# Altium PCB Chargeur Plomb.PcbDoc
Units mil, origin at the board's own origin, x right, y up, seen from the top; angles counter-clockwise.
Board outline 6000 x 4000 mil, 2 copper layers (Top Layer, Bottom Layer); 69 components, 0 nets, 208 pads, 0 vias.
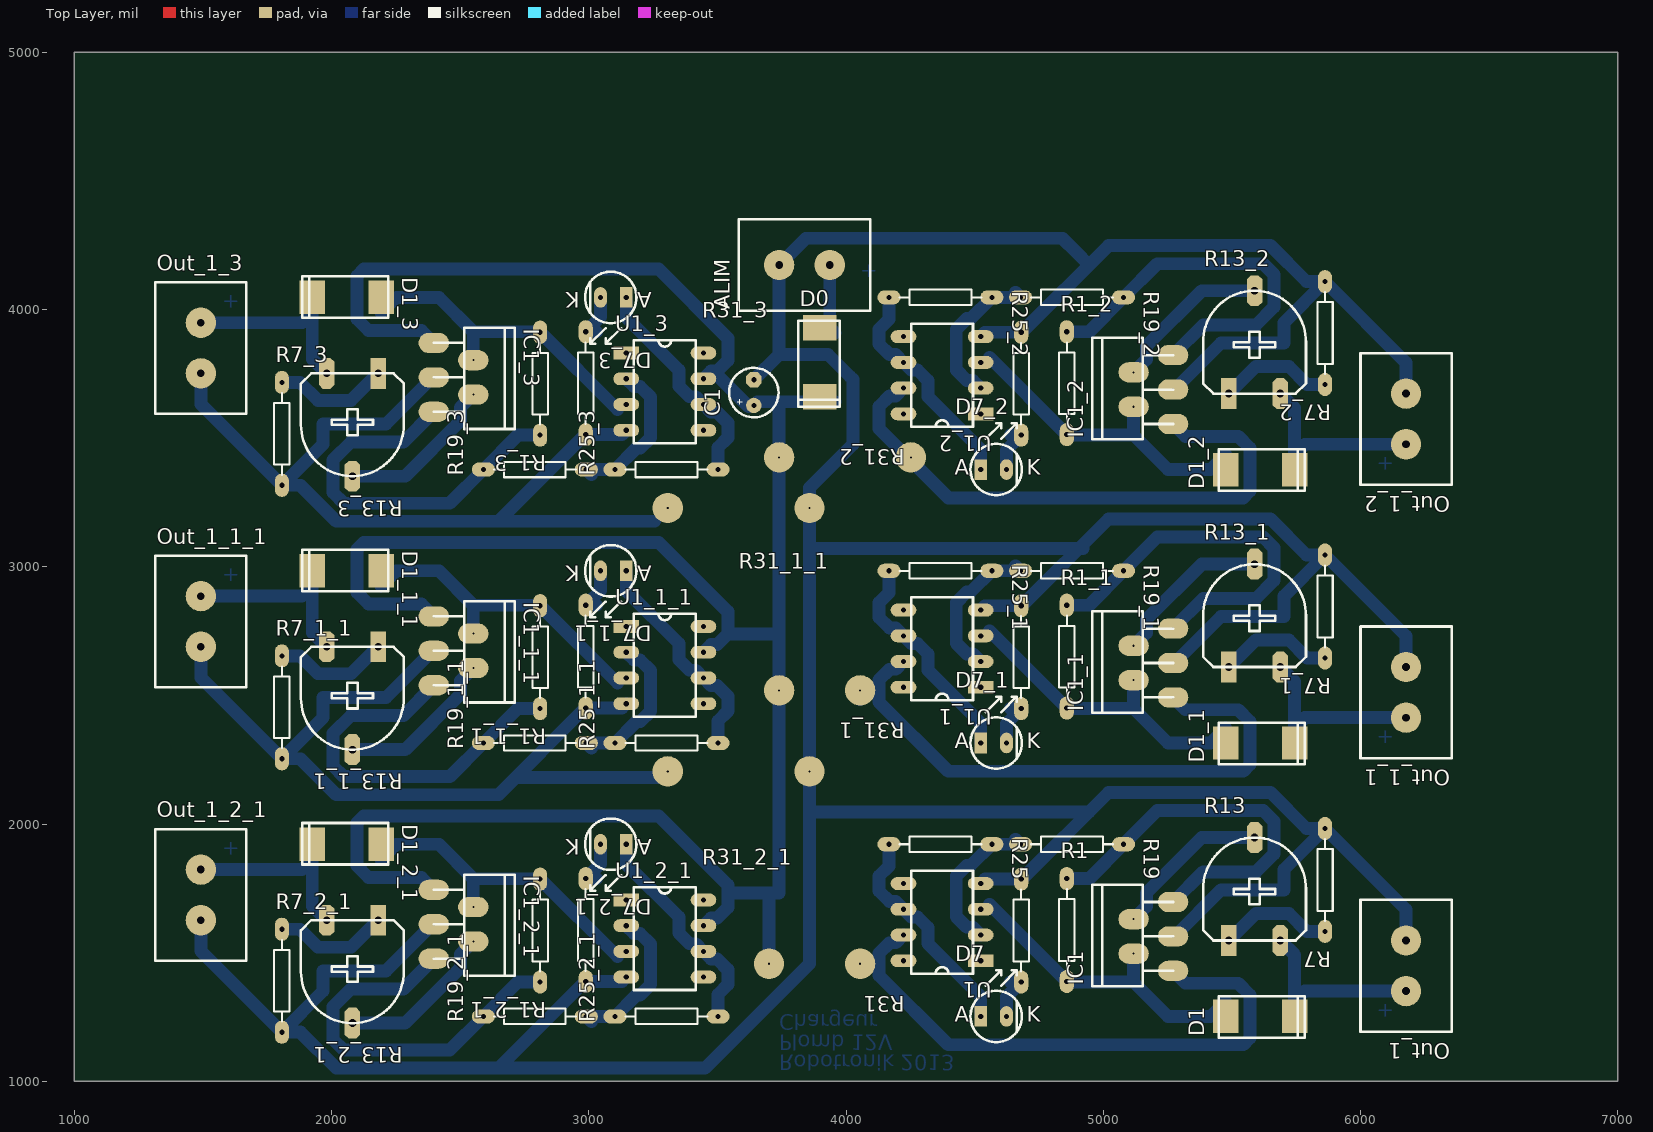
[diagram p0: Top Layer view]
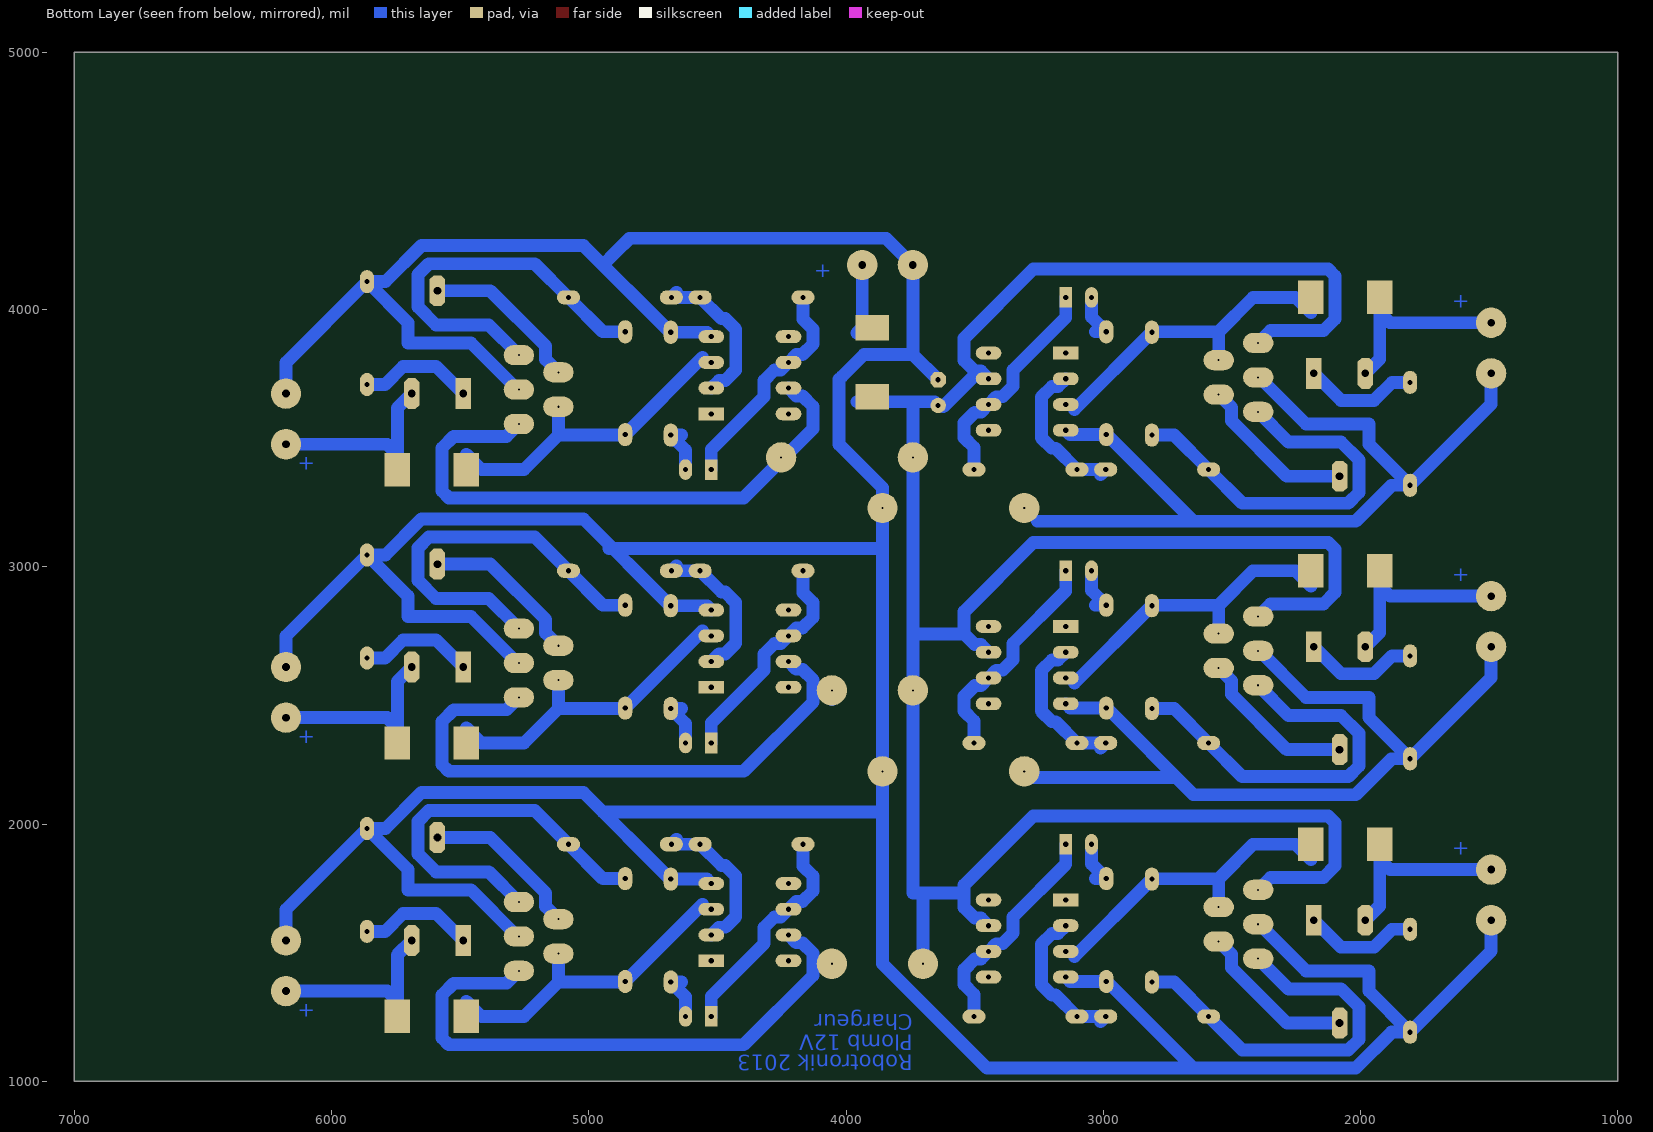
[diagram p1: Bottom Layer view, seen from below]

## Layer stack, top to bottom
Top Solder: solder mask 0.4, Solder Resist, Dk 3.5
Top Layer: signal copper 1.4
Dielectric1: dielectric 12.6, FR-4, Dk 4.8
Bottom Layer: signal copper 1.4
Bottom Solder: solder mask 0.4, Solder Resist, Dk 3.5

## Board outline
1000,1000 7000,1000 7000,5000 1000,5000

## Design rules (kind name [scope] priority, off if disabled: settings)
Clearance [All] p1: gap=20
PolygonConnect [All] p1: connectstyle=Relief reliefconductorwidth=10 reliefentries=4 polygonreliefangle="90 Angle" airgapwidth=10
RoutingVias [All] p1: holewidth=28 width=50 viastyle="Through Hole" minholewidth=28 minwidth=50 maxholewidth=28 maxwidth=50
SilkToSolderMaskClearance SilkscreenOverComponentPads [IsPad] p1: minsilkscreentomaskgap=10 clearancetoexposedcopper=TRUE
SolderMaskExpansion [All] p1: expansion=4
UnpouredPolygon [All] p1: allowunpoured=FALSE
Width [All] p1: maxlimit=50 minlimit=50 preferedwidth=50
28 further rules are at their usual default settings.

## Components (designator, comment, footprint, x,y, rotation, side; value= is the part's Value field where it differs from the comment)
ALIM "Bornier" Bornier 3937.01,4133.86 r180 top
C1 "470uF" Capa_pol1 3641.73,3622.05 r90 top
D0 "Schottky B340" SMC 3897.64,3661.42 r90 top
D1 "Schottky B340" SMC 5744.09,1251.97 r180 top
D1_1 "Schottky B340" SMC 5744.09,2314.96 r180 top (schematic designator D1)
D1_1_1 "Schottky B340" SMC 1925.2,2984.25 r0 top (schematic designator D1)
D1_2 "Schottky B340" SMC 5744.09,3377.95 r180 top (schematic designator D1)
D1_2_1 "Schottky B340" SMC 1925.2,1921.26 r0 top (schematic designator D1)
D1_3 "Schottky B340" SMC 1925.2,4047.24 r0 top (schematic designator D1)
D7 "Led" LED 4523.62,1251.97 r0 top
D7_1 "Led" LED 4523.62,2314.96 r0 top (schematic designator D7)
D7_1_1 "Led" LED 3145.67,2984.25 r180 top (schematic designator D7)
D7_2 "Led" LED 4523.62,3377.95 r0 top (schematic designator D7)
D7_2_1 "Led" LED 3145.67,1921.26 r180 top (schematic designator D7)
D7_3 "Led" LED 3145.67,4047.24 r180 top (schematic designator D7)
IC1 "L200" Pentawatt 5271.65,1429.13 r90 top
IC1_1 "L200" Pentawatt 5271.65,2492.13 r90 top (schematic designator IC1)
IC1_1_1 "L200" Pentawatt 2397.64,2807.09 r270 top (schematic designator IC1)
IC1_2 "L200" Pentawatt 5271.65,3555.12 r90 top (schematic designator IC1)
IC1_2_1 "L200" Pentawatt 2397.64,1744.09 r270 top (schematic designator IC1)
IC1_3 "L200" Pentawatt 2397.64,3870.08 r270 top (schematic designator IC1)
Out_1 "Bornier" Bornier 6216.54,1547.24 r270 top
Out_1_1 "Bornier" Bornier 6216.54,2610.24 r270 top (schematic designator Out_1)
Out_1_1_1 "Bornier" Bornier 1452.76,2688.98 r90 top (schematic designator Out_1)
Out_1_2 "Bornier" Bornier 6216.54,3673.23 r270 top (schematic designator Out_1)
Out_1_2_1 "Bornier" Bornier 1452.76,1625.98 r90 top (schematic designator Out_1)
Out_1_3 "Bornier" Bornier 1452.76,3751.97 r90 top (schematic designator Out_1)
R1 "2.2 ohm" "traversant 1/4W" 4858.27,1527.56 r90 top
R1_1 "2.2 ohm" "traversant 1/4W" 4858.27,2590.55 r90 top (schematic designator R1)
R1_1_1 "2.2 ohm" "traversant 1/4W" 2811.02,2708.66 r270 top (schematic designator R1)
R1_2 "2.2 ohm" "traversant 1/4W" 4858.27,3653.54 r90 top (schematic designator R1)
R1_2_1 "2.2 ohm" "traversant 1/4W" 2811.02,1645.67 r270 top (schematic designator R1)
R1_3 "2.2 ohm" "traversant 1/4W" 2811.02,3771.65 r270 top (schematic designator R1)
R7 "1K" "traversant 1/4W" 5862.2,1842.52 r270 top
R7_1 "1K" "traversant 1/4W" 5862.2,2905.51 r270 top (schematic designator R7)
R7_1_1 "1K" "traversant 1/4W" 1807.09,2393.7 r90 top (schematic designator R7)
R7_2 "1K" "traversant 1/4W" 5862.2,3968.5 r270 top (schematic designator R7)
R7_2_1 "1K" "traversant 1/4W" 1807.09,1330.71 r90 top (schematic designator R7)
R7_3 "1K" "traversant 1/4W" 1807.09,3456.69 r90 top (schematic designator R7)
R13 "RPot" AJUSTABLE 5488.19,1547.24 r0 top
R13_1 "RPot" AJUSTABLE 5488.19,2610.24 r0 top (schematic designator R13)
R13_1_1 "RPot" AJUSTABLE 2181.1,2688.98 r180 top (schematic designator R13)
R13_2 "RPot" AJUSTABLE 5488.19,3673.23 r0 top (schematic designator R13)
R13_2_1 "RPot" AJUSTABLE 2181.1,1625.98 r180 top (schematic designator R13)
R13_3 "RPot" AJUSTABLE 2181.1,3751.97 r180 top (schematic designator R13)
R19 "1K" "traversant 1/4W" 4818.9,1921.26 r0 top
R19_1 "1K" "traversant 1/4W" 4818.9,2984.25 r0 top (schematic designator R19)
R19_1_1 "1K" "traversant 1/4W" 2850.39,2314.96 r180 top (schematic designator R19)
R19_2 "1K" "traversant 1/4W" 4818.9,4047.24 r0 top (schematic designator R19)
R19_2_1 "1K" "traversant 1/4W" 2850.39,1251.97 r180 top (schematic designator R19)
R19_3 "1K" "traversant 1/4W" 2850.39,3377.95 r180 top (schematic designator R19)
R25 "10K" "traversant 1/4W" 4307.09,1921.26 r0 top
R25_1 "10K" "traversant 1/4W" 4307.09,2984.25 r0 top (schematic designator R25)
R25_1_1 "10K" "traversant 1/4W" 3362.2,2314.96 r180 top (schematic designator R25)
R25_2 "10K" "traversant 1/4W" 4307.09,4047.24 r0 top (schematic designator R25)
R25_2_1 "10K" "traversant 1/4W" 3362.2,1251.97 r180 top (schematic designator R25)
R25_3 "10K" "traversant 1/4W" 3362.2,3377.95 r180 top (schematic designator R25)
R31 "1kohm" "traversant 1/4W" 4681.1,1645.67 r270 top
R31_1 "1kohm" "traversant 1/4W" 4681.1,2708.66 r270 top (schematic designator R31)
R31_1_1 "1kohm" "traversant 1/4W" 2988.19,2590.55 r90 top (schematic designator R31)
R31_2 "1kohm" "traversant 1/4W" 4681.1,3771.65 r270 top (schematic designator R31)
R31_2_1 "1kohm" "traversant 1/4W" 2988.19,1527.56 r90 top (schematic designator R31)
R31_3 "1kohm" "traversant 1/4W" 2988.19,3653.54 r90 top (schematic designator R31)
U1 "TL081CN" DIP8 4523.62,1468.5 r180 top
U1_1 "TL081CN" DIP8 4523.62,2531.5 r180 top (schematic designator U1)
U1_1_1 "TL081CN" DIP8 3145.67,2767.72 r0 top (schematic designator U1)
U1_2 "TL081CN" DIP8 4523.62,3594.49 r180 top (schematic designator U1)
U1_2_1 "TL081CN" DIP8 3145.67,1704.72 r0 top (schematic designator U1)
U1_3 "TL081CN" DIP8 3145.67,3830.71 r0 top (schematic designator U1)

## Footprints (in the part's own frame and the unit in brackets; to place one, negate y for a bottom-side part, rotate by r counter-clockwise, add the part's x,y. Pads: shape width x height; smd on the part's side, far side on the other; paste and mask are expansions set on the pad)
AJUSTABLE [mil]
  rect 60x120 hole 30: 1(0,0)
  oct 60x120 hole 30: 2(100,400) 3(200,0)
  silkscreen extent -100,0 300,400
Bornier [mm]
  round 3 hole 0.762: 1(0,-1) 2(5,-1)
  silkscreen extent -4,-5.5 9,3.5
Capa_pol1 [mil]
  round 60 hole 20: 1(5,0)
  oct 60x60 hole 20: 2(105,0)
  silkscreen extent -41,-96 151,96
DIP8 [mil]
  rect 100x50 hole 20: 1(0,0)
  oval 100x50 hole 20: 2(0,-100) 3(0,-200) 4(0,-300) 5(300,-300) 6(300,-200) 7(300,-100) 8(300,0)
  silkscreen extent 30,-350 270,50
LED [mil]
  rect 50x80 hole 20: 1(0,0)
  oval 50x80 hole 20: 2(100,0)
  silkscreen extent -40,-100 160,180
Pentawatt [mm]
  oval 2x3 hole 0.2: 1(0,0) 2(1.7,3.9) 3(3.4,0) 4(5.1,3.9) 5(6.8,0)
  silkscreen extent -1.5,0 8.5,8
SMC [mm]
  rect 2.5x3.3 all layers, no hole: 1(6.8,0) 2(0,0)
  silkscreen extent -1,-2 7.5,2.1
"traversant 1/4W" [mil]
  oval 90x55 hole 20: 1(-140,0) 2(260,0)
  silkscreen extent -99,-30 219,30

## Part data
ALIM Out_1 Out_1_1 Out_1_1_1 Out_1_2 Out_1_2_1 Out_1_3: library part Bornier2
C1: library part "Capa Pol"
D7 D7_1 D7_1_1 D7_2 D7_2_1 D7_3: "LED"
R1 R1_1 R1_1_1 R1_2 R1_2_1 R1_3 R7 R7_1 R7_1_1 R7_2 R7_2_1 R7_3 R19 R19_1 R19_1_1 R19_2 R19_2_1 R19_3 R25 R25_1 R25_1_1 R25_2 R25_2_1 R25_3 R31 R31_1 R31_1_1 R31_2 R31_2_1 R31_3: library part Resistance
R13 R13_1 R13_1_1 R13_2 R13_2_1 R13_3: "Potentiometer"
U1 U1_1 U1_1_1 U1_2 U1_2_1 U1_3: "General-Purpose J-FET Single Operational Amplifier"

## Free pads (board coordinates)
  round 118.11 hole 7.87: 2(3858.27,2204.72) 3(3307.09,2204.72) 6(4055.12,1456.69) 7(3700.79,1456.69) 8(4055.12,2519.68) 9(3740.16,2519.68) 10(3858.27,3228.35) 11(3307.09,3228.35) 12(4251.97,3425.2) 13(3740.16,3425.2)

## Nets (pads, with @x,y where several pads share a name; then routed paths per layer and width w, separated by ;. In a path a pad name is that pad's centre, name@x,y a point inside that pad or via, vN(x,y) a via of type N, cw(c..) or ccw(c..) an arc to the next point about the centre after c; other vN are vias at no path point)
pads on no net: ALIM.1 ALIM.2 C1.1 C1.2 D0.1 D0.2 D1.1 D1.2 D1_1.1 D1_1.2 D1_1_1.1 D1_1_1.2 D1_2.1 D1_2.2 D1_2_1.1 D1_2_1.2 D1_3.1 D1_3.2 D7.1 D7.2 D7_1.1 D7_1.2 D7_1_1.1 D7_1_1.2 D7_2.1 D7_2.2 D7_2_1.1 D7_2_1.2 D7_3.1 D7_3.2 IC1.1 IC1.2 IC1.3 IC1.4 IC1.5 IC1_1.1 IC1_1.2 IC1_1.3 IC1_1.4 IC1_1.5 IC1_1_1.1 IC1_1_1.2 IC1_1_1.3 IC1_1_1.4 IC1_1_1.5 IC1_2.1 IC1_2.2 IC1_2.3 IC1_2.4 IC1_2.5 IC1_2_1.1 IC1_2_1.2 IC1_2_1.3 IC1_2_1.4 IC1_2_1.5 IC1_3.1 IC1_3.2 IC1_3.3 IC1_3.4 IC1_3.5 Out_1.1 Out_1.2 Out_1_1.1 Out_1_1.2 Out_1_1_1.1 Out_1_1_1.2 Out_1_2.1 Out_1_2.2 Out_1_2_1.1 Out_1_2_1.2 Out_1_3.1 Out_1_3.2 R1.1 R1.2 R1_1.1 R1_1.2 R1_1_1.1 R1_1_1.2 R1_2.1 R1_2.2 R1_2_1.1 R1_2_1.2 R1_3.1 R1_3.2 R7.1 R7.2 R7_1.1 R7_1.2 R7_1_1.1 R7_1_1.2 R7_2.1 R7_2.2 R7_2_1.1 R7_2_1.2 R7_3.1 R7_3.2 R13.1 R13.2 R13.3 R13_1.1 R13_1.2 R13_1.3 R13_1_1.1 R13_1_1.2 R13_1_1.3 R13_2.1 R13_2.2 R13_2.3 R13_2_1.1 R13_2_1.2 R13_2_1.3 R13_3.1 R13_3.2 R13_3.3 R19.1 R19.2 R19_1.1 R19_1.2 R19_1_1.1 R19_1_1.2 R19_2.1 R19_2.2 R19_2_1.1 R19_2_1.2 R19_3.1 R19_3.2 R25.1 R25.2 R25_1.1 R25_1.2 R25_1_1.1 R25_1_1.2 R25_2.1 R25_2.2 R25_2_1.1 R25_2_1.2 R25_3.1 R25_3.2 R31.1 R31.2 R31_1.1 R31_1.2 R31_1_1.1 R31_1_1.2 R31_2.1 R31_2.2 R31_2_1.1 R31_2_1.2 R31_3.1 R31_3.2 U1.1 U1.2 U1.3 U1.4 U1.5 U1.6 U1.7 U1.8 U1_1.1 U1_1.2 U1_1.3 U1_1.4 U1_1.5 U1_1.6 U1_1.7 U1_1.8 U1_1_1.1 U1_1_1.2 U1_1_1.3 U1_1_1.4 U1_1_1.5 U1_1_1.6 U1_1_1.7 U1_1_1.8 U1_2.1 U1_2.2 U1_2.3 U1_2.4 U1_2.5 U1_2.6 U1_2.7 U1_2.8 U1_2_1.1 U1_2_1.2 U1_2_1.3 U1_2_1.4 U1_2_1.5 U1_2_1.6 U1_2_1.7 U1_2_1.8 U1_3.1 U1_3.2 U1_3.3 U1_3.4 U1_3.5 U1_3.6 U1_3.7 U1_3.8
copper on no net: | length 81338.9
  Bottom Layer w50: 1492.13,1625.98 1492.13,1505.67 1807.09,1190.71 ; 1492.13,1822.83 1885.83,1822.83 1925.2,1862.2 1925.2,1681.89 1981.1,1625.98 ; 1492.13,2688.98 1492.13,2568.66 1807.09,2253.7 ; 1492.13,2885.83 1885.83,2885.83 1925.2,2925.2 1925.2,2744.88 1981.1,2688.98 ; 1492.13,3751.97 1492.13,3631.65 1807.09,3316.69 ; 1492.13,3948.82 1885.83,3948.82 1925.2,3988.19 1925.2,3807.87 1981.1,3751.97 ; 1807.09,1590.71 1877.74,1590.71 1947.46,1520.98 2076.1,1520.98 2181.1,1625.98 ; 1807.09,2653.7 1877.74,2653.7 1947.46,2583.98 2076.1,2583.98 2181.1,2688.98 ; 1807.09,3716.69 1877.74,3716.69 1947.46,3646.97 2076.1,3646.97 2181.1,3751.97 ; 2081.1,1225.98 2286.25,1225.98 2501.69,1441.43 2501.69,1493.82 2551.18,1543.31 ; 2081.1,2288.98 2286.25,2288.98 2501.69,2504.42 2501.69,2556.81 2551.18,2606.3 ; 2081.1,3351.97 2286.25,3351.97 2501.69,3567.42 2501.69,3619.8 2551.18,3669.29 ; 2192.91,1862.2 2251.97,1921.26 2417.32,1921.26 2551.18,1787.4 ; 2192.91,2925.2 2251.97,2984.25 2417.32,2984.25 2551.18,2850.39 ; 2192.91,3988.19 2251.97,4047.24 2417.32,4047.24 2551.18,3913.39 ; 2397.64,1476.38 2280.39,1359.13 2075.61,1359.13 2006.1,1289.62 2006.1,1162.34 2047.46,1120.98 2459.41,1120.98 2590.39,1251.97 2724.09,1385.67 2811.02,1385.67 ; 2397.64,1610.24 2392.49,1610.24 2211.39,1429.13 1966.77,1429.13 1966.77,1350.39 1807.09,1190.71 ; 2397.64,1744.09 2349.53,1792.2 2144.16,1792.2 2098.7,1837.66 2098.7,2004.86 2125.06,2031.22 2684.76,2031.22 3271.93,2031.22 3540.67,1762.48 3540.67,1675.73 3499.66,1634.72 3475.67,1634.72 3445.67,1604.72 ; 2397.64,2539.37 2280.39,2422.13 2075.61,2422.13 2006.1,2352.62 2006.1,2225.34 2047.46,2183.98 2459.41,2183.98 2590.39,2314.96 2724.09,2448.66 2811.02,2448.66 ; 2397.64,2673.23 2392.49,2673.23 2211.39,2492.13 1966.77,2492.13 1966.77,2413.39 1807.09,2253.7 ; 2397.64,2807.09 2349.53,2855.2 2144.16,2855.2 2098.7,2900.65 2098.7,3067.85 2125.06,3094.21 2684.76,3094.21 3271.93,3094.21 3540.67,2825.47 3540.67,2738.72 ; 2397.64,3602.36 2280.39,3485.12 2075.61,3485.12 2006.1,3415.61 2006.1,3288.33 2047.46,3246.97 2459.41,3246.97 2590.39,3377.95 2724.09,3511.65 2811.02,3511.65 ; 2397.64,3736.22 2392.49,3736.22 2211.39,3555.12 1966.77,3555.12 1966.77,3476.38 1807.09,3316.69 ; 2397.64,3870.08 2349.53,3918.19 2144.16,3918.19 2098.7,3963.64 2098.7,4130.84 2125.06,4157.2 2684.76,4157.2 3271.93,4157.2 3540.67,3888.46 3540.67,3801.71 3499.66,3760.71 ; 2551.18,1677.17 2551.18,1787.4 ; 2551.18,2740.16 2551.18,2850.39 ; 2551.18,3803.15 2551.18,3913.39 ; 2716.54,2181.35 3291.09,2181.35 ; 2990.71,1385.04 2988.19,1387.56 ; 2990.71,2448.03 2988.19,2450.55 ; 2990.71,3511.02 2988.19,3513.54 ; 3010.08,1232.28 2990.39,1251.97 3102.2,1251.97 3184.96,1334.72 3199.66,1334.72 3240.67,1375.73 3240.67,1533.72 3199.66,1574.72 3175.67,1574.72 3145.67,1604.72 ; 3010.08,2295.28 2990.39,2314.96 3102.2,2314.96 3184.96,2397.72 3199.66,2397.72 3240.67,2438.72 3240.67,2596.71 3199.66,2637.72 3175.67,2637.72 3145.67,2667.72 ; 3010.08,3358.27 2990.39,3377.95 3102.2,3377.95 3184.96,3460.71 3199.66,3460.71 3240.67,3501.71 3240.67,3659.7 3199.66,3700.71 3175.67,3700.71 3145.67,3730.71 ; 3030.08,1787.56 2988.19,1787.56 3045.67,1845.04 3045.67,1921.26 ; 3030.08,2850.55 2988.19,2850.55 3045.67,2908.03 3045.67,2984.25 ; 3030.08,3913.54 2988.19,3913.54 3045.67,3971.02 3045.67,4047.24 ; 3111.65,1485.04 2811.02,1785.67 2809.29,1787.4 2551.18,1787.4 ; 3111.65,2548.03 2811.02,2848.66 2809.29,2850.39 2551.18,2850.39 ; 3111.65,3611.02 2811.02,3911.65 2809.29,3913.39 2551.18,3913.39 ; 3145.67,1404.72 3128.5,1387.56 2988.19,1387.56 ; 3145.67,1921.26 3145.67,1843.36 3350.67,1638.36 3350.67,1575.73 3391.67,1534.72 3415.67,1534.72 3445.67,1504.72 3475.67,1474.72 3499.66,1474.72 3540.67,1433.72 3540.67,1375.73 3502.2,1337.27 3502.2,1251.97 ; 3145.67,2467.72 3128.5,2450.55 2988.19,2450.55 ; 3145.67,2984.25 3145.67,2906.36 3350.67,2701.36 3350.67,2638.72 3391.67,2597.72 3415.67,2597.72 3445.67,2567.72 3475.67,2537.72 3499.66,2537.72 3540.67,2496.71 3540.67,2438.72 3502.2,2400.26 3502.2,2314.96 ; 3145.67,3530.71 3128.5,3513.54 2988.19,3513.54 ; 3145.67,4047.24 3145.67,3969.35 3350.67,3764.35 3350.67,3701.71 3391.67,3660.71 3415.67,3660.71 3445.67,3630.71 3475.67,3600.71 3499.66,3600.71 3540.67,3559.7 3540.67,3501.71 3502.2,3463.25 3502.2,3377.95 ; 3255.71,3176.97 2649.16,3176.97 ; 3445.67,2667.72 3475.67,2697.72 3499.66,2697.72 3540.67,2738.72 ; 3445.67,3730.71 3475.67,3760.71 3499.66,3760.71 ; 3540.67,1732.28 3740.16,1732.28 3740.16,3641.73 ; 3622.05,3622.05 3499.66,3744.43 3499.66,3760.71 ; 3641.73,3627.05 3656.42,3641.73 3956.69,3641.73 ; 3641.73,3727.05 3740.16,3825.47 ; 3700.79,1585.13 3700.79,1456.69 3700.79,1732.28 ; 3740.16,2755.91 3722.97,2738.72 3540.67,2738.72 ; 3858.27,2047.24 4945.13,2047.24 ; 3858.27,3070.87 4921.26,3070.87 ; 3937.01,4173.23 3937.01,3929.13 3956.69,3909.45 ; 4055.12,1456.69 4058.62,1456.69 ; 4055.12,2483.82 4055.12,2519.68 ; 4167.09,1921.26 4167.09,1835.96 4128.62,1797.5 4128.62,1739.51 4169.63,1698.5 4193.62,1698.5 4223.62,1668.5 4253.62,1638.5 4277.62,1638.5 4318.62,1597.5 4318.62,1534.86 4523.62,1329.86 4523.62,1251.97 ; 4167.09,2984.25 4167.09,2898.96 4128.62,2860.49 4128.62,2802.5 4169.63,2761.5 4193.62,2761.5 4223.62,2731.5 4253.62,2701.5 4277.62,2701.5 4318.62,2660.49 4318.62,2597.86 4523.62,2392.86 4523.62,2314.96 ; 4167.09,4047.24 4167.09,3961.95 4128.62,3923.48 4128.62,3865.49 4169.63,3824.49 4193.62,3824.49 4223.62,3794.49 4253.62,3764.49 4277.62,3764.49 4318.62,3723.48 4318.62,3660.85 4523.62,3455.85 4523.62,3377.95 ; 4223.62,1568.5 4193.62,1538.5 4169.63,1538.5 4128.62,1497.5 4128.62,1410.75 4397.36,1142.01 4984.53,1142.01 5544.23,1142.01 5570.59,1168.37 5570.59,1335.57 5525.14,1381.02 5319.76,1381.02 5271.65,1429.13 ; 4223.62,2631.5 4193.62,2601.5 4169.63,2601.5 4128.62,2560.49 4128.62,2473.74 4397.36,2205 4984.53,2205 5544.23,2205 5570.59,2231.36 5570.59,2398.56 5525.14,2444.02 5319.76,2444.02 5271.65,2492.13 ; 4223.62,3694.49 4193.62,3664.49 4169.63,3664.49 4128.62,3623.48 4128.62,3536.73 4397.36,3267.99 4984.53,3267.99 5544.23,3267.99 5570.59,3294.35 5570.59,3461.55 5525.14,3507.01 5319.76,3507.01 5271.65,3555.12 ; 4523.62,1568.5 4493.62,1598.5 4469.63,1598.5 4428.62,1639.51 4428.62,1797.5 4469.63,1838.5 4484.33,1838.5 4567.09,1921.26 4678.9,1921.26 4659.21,1940.94 ; 4523.62,1768.5 4540.79,1785.67 4681.1,1785.67 ; 4523.62,2631.5 4493.62,2661.5 4469.63,2661.5 4428.62,2702.5 4428.62,2860.49 4469.63,2901.5 4484.33,2901.5 4567.09,2984.25 4678.9,2984.25 4659.21,3003.94 ; 4523.62,2831.5 4540.79,2848.66 4681.1,2848.66 ; 4523.62,3694.49 4493.62,3724.49 4469.63,3724.49 4428.62,3765.49 4428.62,3923.48 4469.63,3964.49 4484.33,3964.49 4567.09,4047.24 4678.9,4047.24 4659.21,4066.93 ; 4523.62,3894.49 4540.79,3911.65 4681.1,3911.65 ; 4557.64,1688.19 4858.27,1387.56 4860,1385.83 5118.11,1385.83 ; 4557.64,2751.18 4858.27,2450.55 4860,2448.82 5118.11,2448.82 ; 4557.64,3814.17 4858.27,3513.54 4860,3511.81 5118.11,3511.81 ; 4623.62,1251.97 4623.62,1328.19 4681.1,1385.67 4639.21,1385.67 ; 4623.62,2314.96 4623.62,2391.18 4681.1,2448.66 4639.21,2448.66 ; 4623.62,3377.95 4623.62,3454.17 4681.1,3511.65 4639.21,3511.65 ; 4678.58,1788.19 4681.1,1785.67 ; 4678.58,2851.18 4681.1,2848.66 ; 4678.58,3914.17 4681.1,3911.65 ; 4858.27,1787.56 4945.2,1787.56 5078.9,1921.26 5209.88,2052.24 5621.83,2052.24 5663.19,2010.88 5663.19,1883.6 5593.68,1814.09 5388.9,1814.09 5271.65,1696.85 ; 4858.27,2850.55 4945.2,2850.55 5078.9,2984.25 5209.88,3115.24 5621.83,3115.24 5663.19,3073.88 5663.19,2946.6 5593.68,2877.09 5388.9,2877.09 5271.65,2759.84 ; 4858.27,3913.54 4945.2,3913.54 5078.9,4047.24 5209.88,4178.23 5621.83,4178.23 5663.19,4136.87 5663.19,4009.59 5593.68,3940.08 5388.9,3940.08 5271.65,3822.83 ; 4945.13,4173.23 4895.63,4222.73 4841.07,4277.28 3844.21,4277.28 3818.9,4251.97 3740.16,4173.23 3740.16,3825.47 ; 5118.11,1496.06 5118.11,1385.83 ; 5118.11,1629.92 5167.6,1679.41 5167.6,1731.8 5383.04,1947.24 5588.19,1947.24 ; 5118.11,2559.06 5118.11,2448.82 ; 5118.11,2692.91 5167.6,2742.4 5167.6,2794.79 5383.04,3010.24 5588.19,3010.24 ; 5118.11,3622.05 5118.11,3511.81 ; 5118.11,3755.91 5167.6,3805.39 5167.6,3857.78 5383.04,4073.23 5588.19,4073.23 ; 5271.65,1562.99 5276.8,1562.99 5457.9,1744.09 5702.52,1744.09 5702.52,1822.83 5862.2,1982.52 ; 5271.65,2625.98 5276.8,2625.98 5457.9,2807.09 5702.52,2807.09 5702.52,2885.83 5862.2,3045.51 ; 5271.65,3688.98 5276.8,3688.98 5457.9,3870.08 5702.52,3870.08 5702.52,3948.82 5862.2,4108.5 ; 5476.38,1311.02 5417.32,1251.97 5251.97,1251.97 5118.11,1385.83 ; 5476.38,2374.02 5417.32,2314.96 5251.97,2314.96 5118.11,2448.82 ; 5476.38,3437.01 5417.32,3377.95 5251.97,3377.95 5118.11,3511.81 ; 5488.19,1547.24 5593.19,1652.24 5721.83,1652.24 5791.55,1582.52 5862.2,1582.52 ; 5488.19,2610.24 5593.19,2715.24 5721.83,2715.24 5791.55,2645.51 5862.2,2645.51 ; 5488.19,3673.23 5593.19,3778.23 5721.83,3778.23 5791.55,3708.5 5862.2,3708.5 ; 5688.19,1547.24 5744.09,1491.34 5744.09,1311.02 5783.46,1350.39 6177.17,1350.39 ; 5688.19,2610.24 5744.09,2554.33 5744.09,2374.02 5783.46,2413.39 6177.17,2413.39 ; 5688.19,3673.23 5744.09,3617.32 5744.09,3437.01 5783.46,3476.38 6177.17,3476.38 ; 6177.17,1547.24 6177.17,1667.56 5862.2,1982.52 ; 6177.17,2610.24 6177.17,2730.55 5862.2,3045.51 ; 6177.17,3673.23 6177.17,3793.54 5862.2,4108.5 ; 1807.09,1190.71 1878.74,1190.71 2018.47,1050.98 2649.16,1050.98 ; 1807.09,2253.7 1878.74,2253.7 2018.47,2113.98 2649.16,2113.98 2985.74,2450.55 2988.19,2450.55 ; 1807.09,3316.69 1878.74,3316.69 2018.47,3176.97 2649.16,3176.97 ; 2649.16,1050.98 2985.74,1387.56 2988.19,1387.56 ; 2649.16,1050.98 3452.56,1050.98 3858.27,1456.69 3858.27,1574.8 3858.27,3307.09 4026.69,3475.51 4026.69,3729.21 4015.75,3740.16 3930.43,3825.47 3740.16,3825.47 ; 2649.16,3176.97 2985.74,3513.54 2988.19,3513.54 ; 4681.1,1785.67 4683.55,1785.67 5020.13,2122.24 5650.82,2122.24 5790.55,1982.52 5862.2,1982.52 ; 4681.1,2848.66 4683.55,2848.66 5020.13,3185.24 5650.82,3185.24 5790.55,3045.51 5862.2,3045.51 ; 4681.1,3911.65 4683.55,3911.65 5020.13,4248.23 5650.82,4248.23 5790.55,4108.5 5862.2,4108.5

## Other copper
Bottom Layer:
  text "+" at 4055.12,4173.23 h60 r180
  text "+" at 1574.8,4055.12 h60 r180
  text "+" at 6062.99,3425.2 h60 r180
  text "+" at 1574.8,2992.13 h60 r180
  text "+" at 6062.99,2362.2 h60 r180
  text "+" at 1574.8,1929.13 h60 r180
  text "+" at 6062.99,1299.21 h60 r180
  text "Chargeur" at 3740.16,1259.84 h60 r180
  text "Plomb 12V" at 3740.16,1181.1 h60 r180
  text "Robotronik 2013" at 3740.16,1102.36 h60 r180

## Text inside footprints (layer, text, board x,y; h text height)
D7: Top Overlay "K" at 4703.62,1231.97 h60; Top Overlay "A" at 4423.62,1231.97 h60
D7_1: Top Overlay "K" at 4703.62,2294.96 h60; Top Overlay "A" at 4423.62,2294.96 h60
D7_1_1: Top Overlay "K" at 2965.67,3004.25 h60 r180; Top Overlay "A" at 3245.67,3004.25 h60 r180
D7_2: Top Overlay "K" at 4703.62,3357.95 h60; Top Overlay "A" at 4423.62,3357.95 h60
D7_2_1: Top Overlay "K" at 2965.67,1941.26 h60 r180; Top Overlay "A" at 3245.67,1941.26 h60 r180
D7_3: Top Overlay "K" at 2965.67,4067.24 h60 r180; Top Overlay "A" at 3245.67,4067.24 h60 r180